# Altium PCB test.PcbDoc
Units mil, origin at the board's own origin, x right, y up, seen from the top; angles counter-clockwise.
Board outline 2620 x 3810 mil, 2 copper layers (Top Layer, Bottom Layer); 80 components, 68 nets, 300 pads, 0 vias.
Unrouted connection lines stored in the file: 148.
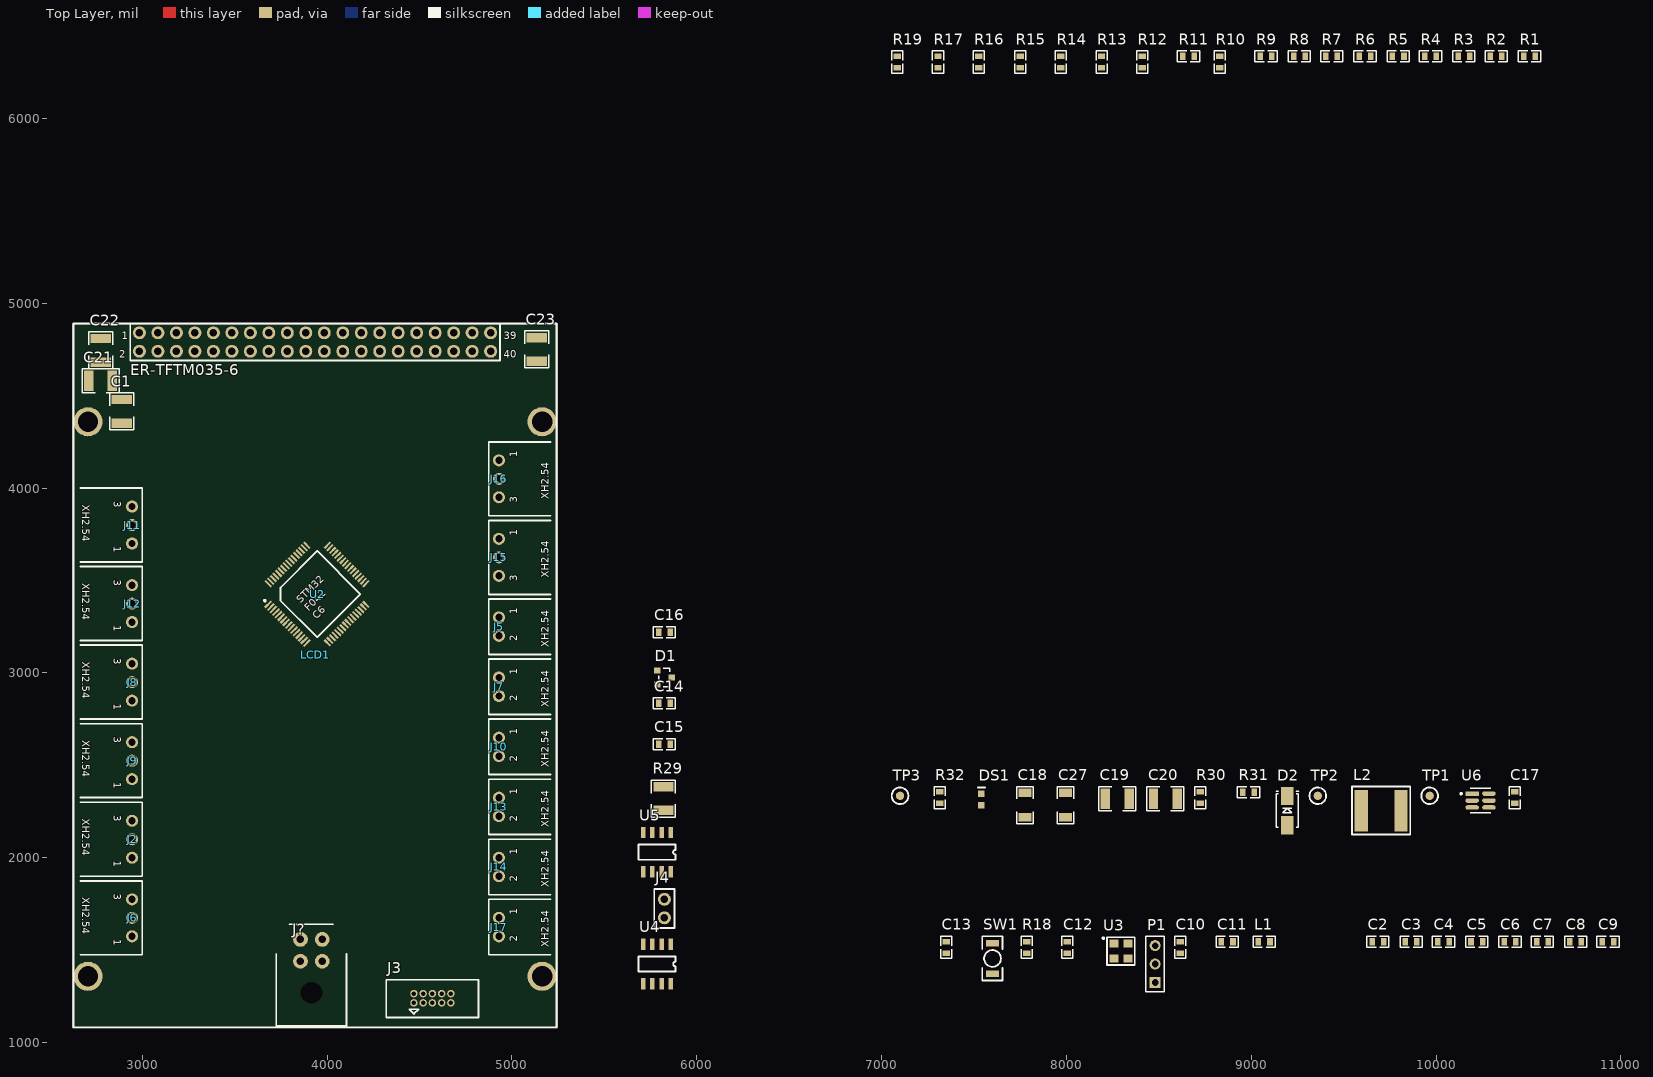
[diagram p0: Top Layer view]
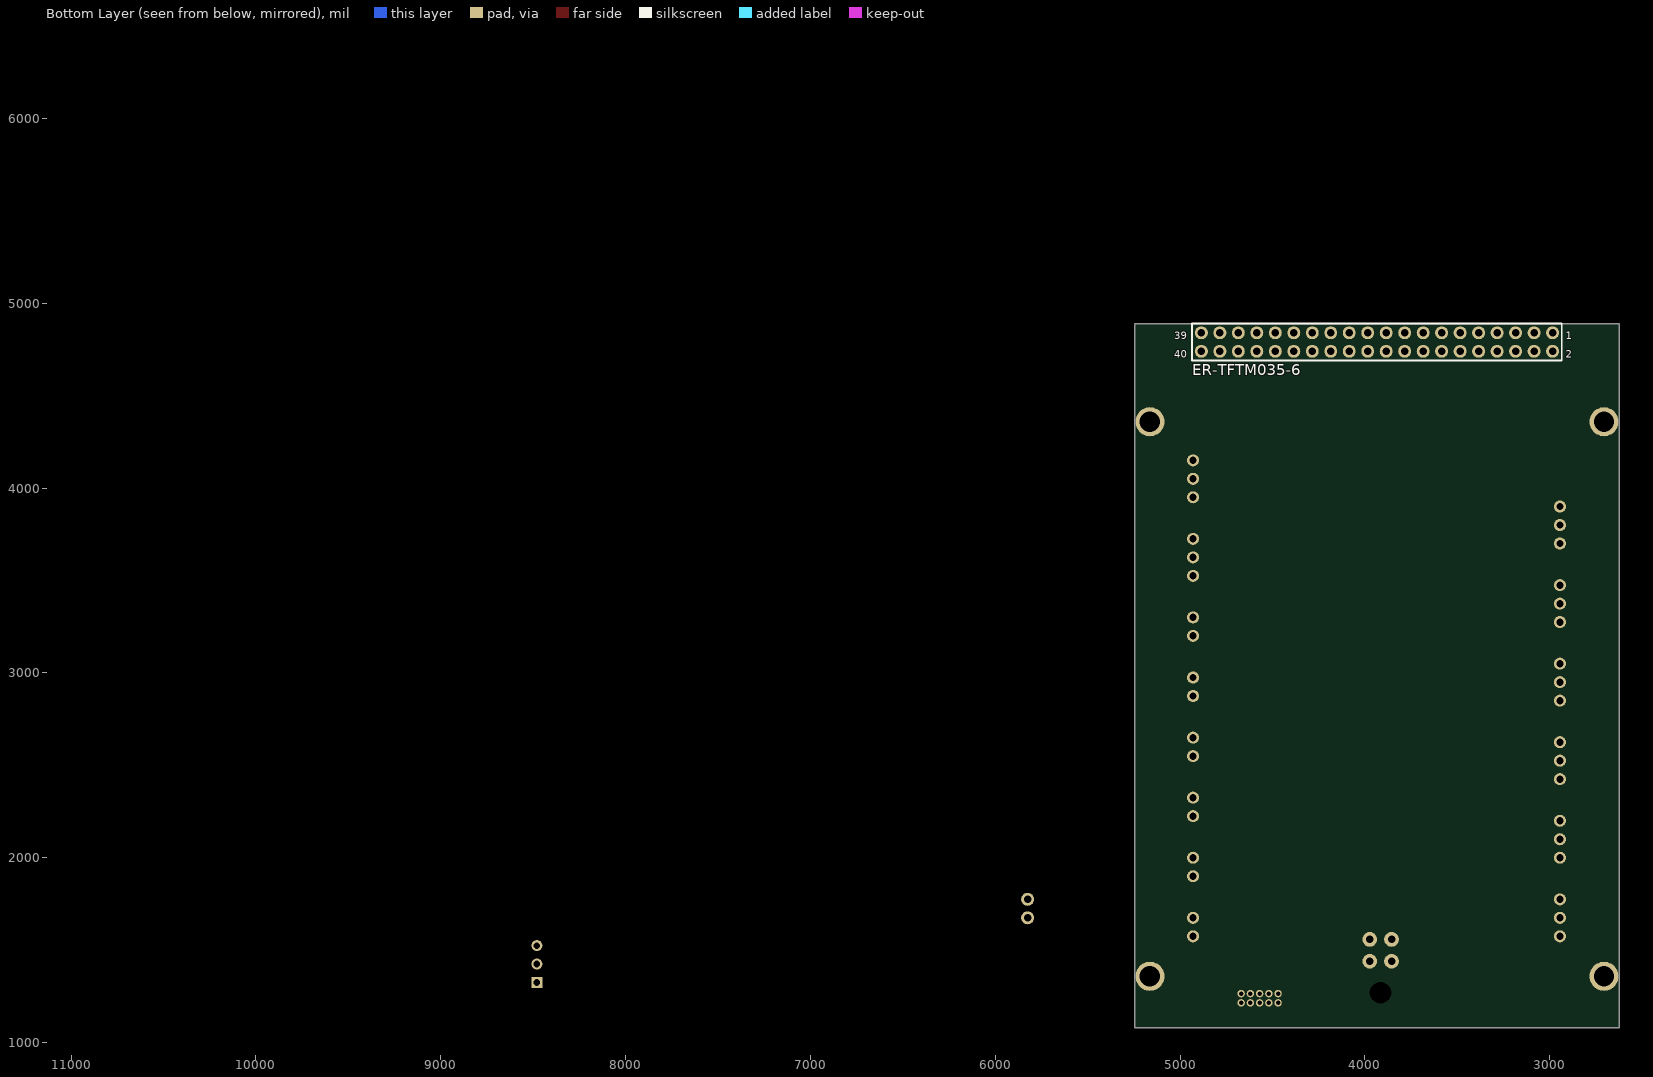
[diagram p1: Bottom Layer view, seen from below]

## Layer stack, top to bottom
Top Solder: solder mask 0.4, Solder Resist, Dk 3.5
Top Layer: signal copper 1.4
Dielectric 1: dielectric 12.6, FR-4, Dk 4.8
Bottom Layer: signal copper 1.4
Bottom Solder: solder mask 0.4, Solder Resist, Dk 3.5

## Board outline
2625,1080 2625,4890 5245,4890 5245,1080

## Design rules (kind name [scope] priority, off if disabled: settings)
Clearance [All] p1: gap=10 ignorepadtopadclearanceinfootprint=FALSE except(0: Arc-Hole Track-Hole SMDPad-Hole THPad-Hole Via-Hole Fill-Hole Poly-Hole Region-Hole Text-Hole)
PolygonConnect [All] p1: connectstyle=Relief reliefconductorwidth=10 reliefentries=4 polygonreliefangle="90 Angle" airgapwidth=10
RoutingVias [All] p1: holewidth=28 width=50 viastyle="Through Hole" minholewidth=28 minwidth=50 maxholewidth=28 maxwidth=50
SolderMaskExpansion [All] p1: expansion=4 istentingtop=FALSE
Width [All] p1: maxlimit=10 minlimit=10 preferedwidth=10
30 further rules are at their usual default settings.

## Classes and differential pairs
component class STRWHL-S01-V00-SteeringWheel: J?
component class STRWHL-S06-V00-Interface: J2 J5 J6 J7 J8 J9 J10 J11 J12 J13 J14 J15 J16 J17
component class STRWHL-S05-V00-Screen: C1 C21 C22 C23 LCD1 R1 R2 R3 R4 R5 R6 R7 R8 R9 R10 R11 R12 R13 R14 R15 R16 R17 R19
component class STRWHL-S04-V00-PSU: C17 C18 C19 C20 C27 D2 DS1 L2 R30 R31 R32 TP1 TP2 TP3 U6
component class STRWHL-S03-V00-IsolatedCAN: C14 C15 C16 D1 J4 R29 U4 U5
component class STRWHL-S02-V00-Microcontroller: C2 C3 C4 C5 C6 C7 C8 C9 C10 C11 C12 C13 J3 L1 P1 R18 SW1 U2 U3

## Components (designator, comment, footprint, x,y, rotation, side; value= is the part's Value field where it differs from the comment)
C1 "47uF 16V 1210" Cap_Ceramic_1210 2890,4415 r90 top
C2 "100nF" Cap_Ceramic_0603 9685,1545 r0 top
C3 "4u7" Cap_Ceramic_0603 9865,1545 r0 top
C4 "100nF" Cap_Ceramic_0603 10040,1545 r0 top
C5 "4u7" Cap_Ceramic_0603 10220,1545 r0 top
C6 "100nF" Cap_Ceramic_0603 10400,1545 r0 top
C7 "4u7" Cap_Ceramic_0603 10575,1545 r0 top
C8 "100nF" Cap_Ceramic_0603 10755,1545 r0 top
C9 "4u7" Cap_Ceramic_0603 10930,1545 r0 top
C10 "1uF" Cap_Ceramic_0603 8615,1515 r90 top
C11 "10nF" Cap_Ceramic_0603 8870,1545 r0 top
C12 "100nF" Cap_Ceramic_0603 8005,1515 r90 top
C13 "100nF" Cap_Ceramic_0603 7350,1515 r90 top
C14 "100nF" Cap_Ceramic_0603 5825,2835 r0 top
C15 "100nF" Cap_Ceramic_0603 5825,2615 r0 top
C16 "100nF" Cap_Ceramic_0603 5825,3220 r0 top
C17 "100nF 100V" Cap_Ceramic_0603 10425,2325 r90 top
C18 "22uF 35V 1206" Cap_Ceramic_1206 7775,2285 r90 top
C19 "47uF 16V 10% X7R 1210" Cap_Ceramic_1210 8275,2320 r0 top
C20 "47uF 16V 10% X7R 1210" Cap_Ceramic_1210 8535,2320 r0 top
C21 "47uF 16V 1210" Cap_Ceramic_1210 2775,4580 r0 top
C22 "47uF 16V 1210" Cap_Ceramic_1210 2775,4745 r270 top
C23 "47uF 16V 1210" Cap_Ceramic_1210 5135,4750 r270 top
C27 "22uF 35V 1206" Cap_Ceramic_1206 7995,2285 r90 top
D1 "NUP2105L" NUP2105L 5825,2975 r270 top
D2 "B260A-13-F" SMA 9195,2255 r90 top
DS1 "LED Green 0603" "LED GREEN 0603" 7540,2315 r90 top
J2 "XH2.54 3P" JST_XH254_3P_TH_RH 2945,2100 r270 top
J3 "IDC 10P 2x5 1.27mm" "IDC 1.27MM 10P" 4570,1240 r0 top
J4 "Jumper 2Way Pins" Jumper_2Way_Pin 5825,1675 r270 top
J5 "XH2.54 2P" JST_XH254_2P_TH_RH 4930,3250 r90 top
J6 "XH2.54 3P" JST_XH254_3P_TH_RH 2945,1675 r270 top
J7 "XH2.54 2P" JST_XH254_2P_TH_RH 4930,2925 r90 top
J8 "XH2.54 3P" JST_XH254_3P_TH_RH 2945,2950 r270 top
J9 "XH2.54 3P" JST_XH254_3P_TH_RH 2945,2525 r270 top
J10 "XH2.54 2P" JST_XH254_2P_TH_RH 4930,2600 r90 top
J11 "XH2.54 3P" JST_XH254_3P_TH_RH 2945,3800 r270 top
J12 "XH2.54 3P" JST_XH254_3P_TH_RH 2945,3375 r270 top
J13 "XH2.54 2P" JST_XH254_2P_TH_RH 4930,2275 r90 top
J14 "XH2.54 2P" JST_XH254_2P_TH_RH 4930,1950 r90 top
J15 "XH2.54 3P" JST_XH254_3P_TH_RH 4930,3625 r90 top
J16 "XH2.54 3P" JST_XH254_3P_TH_RH 4930,4050 r90 top
J17 "XH2.54 2P" JST_XH254_2P_TH_RH 4930,1625 r90 top
J? "Microfit 3.0 2x2" Microfit_2X2_R_TH 3915,1270 r0 top
L1 "10uH, 10%, 0603" Inductor_0603 9070,1545 r0 top
L2 "74404064221" Inductor_6x6mm 9700,2255 r0 top
LCD1 "ER-TFTM035-6" ER-TFTM035-6 3935,4890 r0 top locked
P1 "UART" HDR1X3 8480,1325 r90 top
R1 "10k" Res_ThinFilm_0603 10505,6335 r0 top
R2 "10k" Res_ThinFilm_0603 10325,6335 r0 top
R3 "10k" Res_ThinFilm_0603 10150,6335 r0 top
R4 "10k" Res_ThinFilm_0603 9970,6335 r0 top
R5 "10k" Res_ThinFilm_0603 9795,6335 r0 top
R6 "10k" Res_ThinFilm_0603 9615,6335 r0 top
R7 "10k" Res_ThinFilm_0603 9435,6335 r0 top
R8 "10k" Res_ThinFilm_0603 9260,6335 r0 top
R9 "10k" Res_ThinFilm_0603 9080,6335 r0 top
R10 "10k" Res_ThinFilm_0603 8830,6305 r90 top
R11 "10k" Res_ThinFilm_0603 8660,6335 r0 top
R12 "10k" Res_ThinFilm_0603 8410,6305 r90 top
R13 "10k" Res_ThinFilm_0603 8190,6305 r90 top
R14 "10k" Res_ThinFilm_0603 7970,6305 r90 top
R15 "10k" Res_ThinFilm_0603 7750,6305 r90 top
R16 "10k" Res_ThinFilm_0603 7525,6305 r90 top
R17 "10k" Res_ThinFilm_0603 7305,6305 r90 top
R18 "4k7" Res_ThinFilm_0603 7785,1515 r90 top
R19 "10k" Res_ThinFilm_0603 7085,6305 r90 top
R29 "120R 1% 1210" Res_ThinFilm_1210 5820,2320 r270 top
R30 "64k9 1%" Res_ThinFilm_0603 8725,2325 r90 top
R31 "1k" Res_ThinFilm_0603 8985,2355 r0 top
R32 "19k6 1%" Res_ThinFilm_0603 7315,2325 r90 top
SW1 "B3U-1000P" "BTN B3U-1000P" 7600,1455 r90 top
TP1 "TestPoint_SMD" TestPointSMD 9965,2335 r0 top
TP2 "TestPoint_SMD" TestPointSMD 9360,2335 r0 top
TP3 "TestPoint_SMD" TestPointSMD 7100,2335 r0 top
U2 "STM32F302RC" STM32F302RC -1357.34,1472.54 r45 top
U3 "DSC1001DI1-008.0000T" DSC1001DI1-008.0000TCT-ND 8295,1495 r0 top
U4 "Si8621BC-B-IS" Si8621BC-B-IS 5785,1425 r270 top
U5 "SN65HVD233" SN65HVD233DR 5785,2030 r270 top
U6 "LMR14010" LMR14010 10240,2310 r0 top

## Footprints (in the part's own frame and the unit in brackets; to place one, negate y for a bottom-side part, rotate by r counter-clockwise, add the part's x,y. Pads: shape width x height; smd on the part's side, far side on the other; paste and mask are expansions set on the pad)
"BTN B3U-1000P" [mil] "OMRON B3U-1000P"
  rect 35x70 smd: 1(-82.68,0) 2(82.68,0)
  silkscreen extent -120,-55 120,55, body extent -79,-49 79,49, height 63
Cap_Ceramic_0603 [mil]
  rect 30x40 smd: 1(-31.24,0) 2(31.24,0)
  silkscreen extent -60,-30 60,30, body extent -31,-16 32,16, height 33
Cap_Ceramic_1206 [mil]
  rect 47x71 smd: 1(-66.08,0) 2(66.08,0)
  silkscreen extent -100,-45 100,45, body extent -63,-31 63,32, height 53
Cap_Ceramic_1210 [mm]
  rect 1.3x2.8 smd: 1(-1.625,0) 2(1.625,0)
  silkscreen extent -2.54,-1.65 2.54,1.65, body extent -1.6,-1.25 1.6,1.25, height 1.35
DSC1001DI1-008.0000TCT-ND [mil]
  rect 48x43 smd: 1(-37.4,41.34) 2(37.4,41.34) 3(37.4,-41.34) 4(-37.4,-41.34)
  silkscreen extent -100,-75 75,75, body extent -49,-63 49,63, height 33
ER-TFTM035-6 [mil]
  round 70 hole 40: 1(-950,-50) 2(-950,-150) 3(-850,-50) 4(-850,-150) 5(-750,-50) 6(-750,-150) 7(-650,-50) 8(-650,-150) 9(-550,-50) 10(-550,-150) 11(-450,-50) 12(-450,-150) 13(-350,-50) 14(-350,-150) 15(-250,-50) 16(-250,-150) 17(-150,-50) 18(-150,-150) 19(-50,-50) 20(-50,-150) 21(50,-50) 22(50,-150) 23(150,-50) 24(150,-150) 25(250,-50) 26(250,-150) 27(350,-50) 28(350,-150) 29(450,-50) 30(450,-150) 31(550,-50) 32(550,-150) 33(650,-50) 34(650,-150) 35(750,-50) 36(750,-150) 37(850,-50) 38(850,-150) 39(950,-50) 40(950,-150)
  round 157.48 hole 110.24: N/C(-1228.35,-3531.5) N/C(-1228.35,-531.5) N/C(1228.35,-3531.5) N/C(1228.35,-531.5)
  silkscreen extent -1307,-3807 1307,0, body extent -1305,-3805 1305,0, height 598
HDR1X3 [mm] "Connector; Header; 3 Position"
  rect 1.5x1.5 hole 0.9: 1(0,0)
  round 1.5 hole 0.9: 2(2.54,0) 3(5.08,0)
  silkscreen extent -1.27,-1.27 6.35,1.27
"IDC 1.27MM 10P" [mil]
  round 40 hole 25: 1(-100,-25) 2(-100,25) 3(-50,-25) 4(-50,25) 5(0,-25) 6(0,25) 7(50,-25) 8(50,25) 9(100,-25) 10(100,25)
  silkscreen extent -250,-105 250,100, body extent -249,-104 249,100, height 214
Inductor_6x6mm [mm]
  rect 1.8x5.7 smd: 1(-2.667,0) 2(2.794,0)
  silkscreen extent -3.94,-3.3 4.06,3.3, body extent -3,-3 3,3, height 4.56
Inductor_0603 [mil]
  rect 30x40 smd: 1(-31.24,0) 2(31.24,0)
  silkscreen extent -60,-30 60,30, body extent -31,-16 32,16, height 18
JST_XH254_2P_TH_RH [mil]
  round 65 hole 40: 1(50,0) 2(-50,0)
  silkscreen extent -150,-280 150,55, body extent -142,-307 142,10, height 230
JST_XH254_3P_TH_RH [mil]
  round 65 hole 40: 1(100,0) 2(0,0) 3(-100,0)
  silkscreen extent -200,-280 200,55, body extent -192,-307 192,10, height 230
Jumper_2Way_Pin [mil]
  round 70 hole 40: 1(-100,0) 2(0,0)
  silkscreen extent -155,-55 55,55, body extent -142,-48 42,47, height 332
"LED GREEN 0603" [mil]
  rect 35x35 smd: 1(-30,0) 2(30,0)
  silkscreen extent 65,-20 65,20, body extent -40,-20 40,20, height 30
LMR14010 [mil]
  rect 73.01x24.1 smd paste+0 mask+0: 1(-44.73,36.75)
  rrect100% 73.01x24.1 smd paste+0 mask+0: 2(-44.73,-0.65) 3(-44.73,-38.05) 4(45.84,-38.05) 5(45.84,-0.65) 6(45.84,36.75)
  silkscreen extent -110,-68 56,66, body extent -101,-77 102,76, height 10
Microfit_2X2_R_TH [mil]
  round 80 hole 40: 1(59.06,170) 2(-59.06,170) 3(59.06,288.19) 4(-59.06,288.19)
  round 0 hole 118.11 mask+10: NC(0,0)
  silkscreen extent -190,-180 190,370, body extent -200,-180 200,302, height 350
NUP2105L [mm]
  rect 0.8x0.9 smd: 1(-0.95,-1) 2(0.95,-1) 3(0,1)
  silkscreen extent -1.27,-0.76 1.27,0.76, body extent -1.45,-1.22 1.45,1.18, height 1
Res_ThinFilm_0603 [mil]
  rect 30x40 smd: 1(-31.24,0) 2(31.24,0)
  silkscreen extent -60,-30 60,30, body extent -31,-16 32,16, height 18
Res_ThinFilm_1210 [mm]
  rect 1.3x2.8 smd: 1(-1.625,0) 2(1.625,0)
  silkscreen extent -2.54,-1.65 2.54,1.65, body extent -1.6,-1.25 1.6,1.25, height 0.6
Si8621BC-B-IS [mm]
  rect 1.55x0.6 smd: 1(-2.7,1.905) 2(-2.7,0.635) 3(-2.7,-0.635) 4(-2.7,-1.905) 5(2.7,-1.905) 6(2.7,-0.635) 7(2.7,0.635) 8(2.7,1.905)
  silkscreen extent -1.04,-2.54 1.04,2.54, body extent -3.01,-2.45 3.01,2.45, height 1.63
SMA [mm]
  rect 2.5x1.7 smd: A(-2,0) K(2,0)
  silkscreen extent -2.3,-1.52 2.67,1.52, body extent -2.52,-1.46 2.52,1.46, height 2.4
SN65HVD233DR [mm]
  rect 1.55x0.6 smd: 1(-2.7,1.903) 2(-2.7,0.633) 3(-2.7,-0.637) 4(-2.7,-1.907) 5(2.7,-1.907) 6(2.7,-0.637) 7(2.7,0.633) 8(2.7,1.903)
  silkscreen extent -1.04,-2.54 1.04,2.54, body extent -3.01,-2.45 3.01,2.45, height 1.63
STM32F302RC [mm]
  rect 1.3x0.3 smd: 1(124.596,-56.413) 2(124.596,-56.913) 3(124.596,-57.413) 4(124.596,-57.913) 5(124.596,-58.413) 6(124.596,-58.913) 7(124.596,-59.413) 8(124.596,-59.913) 9(124.596,-60.413) 10(124.596,-60.913) 11(124.596,-61.413) 12(124.596,-61.913) 13(124.596,-62.413) 14(124.596,-62.913) 15(124.596,-63.413) 16(124.596,-63.913)
  rect 0.3x1.2 smd: 17(126.596,-65.913) 18(127.096,-65.913) 19(127.596,-65.913) 20(128.096,-65.913) 21(128.596,-65.913) 22(129.096,-65.913) 23(129.596,-65.913) 24(130.096,-65.913) 25(130.596,-65.913) 26(131.096,-65.913) 27(131.596,-65.913) 28(132.096,-65.913) 29(132.596,-65.913) 30(133.096,-65.913) 31(133.596,-65.913) 32(134.096,-65.913) 49(134.096,-54.413) 50(133.596,-54.413) 51(133.096,-54.413) 52(132.596,-54.413) 53(132.096,-54.413) 54(131.596,-54.413) 55(131.096,-54.413) 56(130.596,-54.413) 57(130.096,-54.413) 58(129.596,-54.413) 59(129.096,-54.413) 60(128.596,-54.413) 61(128.096,-54.413) 62(127.596,-54.413) 63(127.096,-54.413) 64(126.596,-54.413)
  rect 1.2x0.3 smd: 33(136.096,-63.913) 34(136.096,-63.413) 35(136.096,-62.913) 36(136.096,-62.413) 37(136.096,-61.913) 38(136.096,-61.413) 39(136.096,-60.913) 40(136.096,-60.413) 41(136.096,-59.913) 42(136.096,-59.413) 43(136.096,-58.913) 44(136.096,-58.413) 45(136.096,-57.913) 46(136.096,-57.413) 47(136.096,-56.913) 48(136.096,-56.413)
  silkscreen extent 124.5,-64.35 134.54,-55.59, body extent 124.28,-66.23 136.42,-54.09, height 1.6
TestPointSMD [mil]
  round 45 smd: 1(0,0)
  silkscreen extent -45,-45 45,45

## Part data
C1 C21 C22 C23: library part "47uF 16V 10% X7R 1210", "Capacitor, Ceramic, SMD, 47uF, 16V, 5%, X7R, 1210"
C2 C4 C6 C8 C12 C13 C14 C15 C16: library part "100nF 50V 5% X7R 0603", "Capacitor, Ceramic, SMD, 100nF, 50V, 5%, X7R, 0603"
C3 C5 C7 C9: library part "4u7 50V 5% X7R 0603", "Capacitor, Ceramic, SMD, 4u7, 50V, 5%, X7R, 0603"
C10: library part "1uF 25V 5% X7R 0603", "Capacitor, Ceramic, SMD, 1uF, 25V, 5%, X7R, 0603"
C11: library part "10nF 50V 5% X7R 0603", "Capacitor, Ceramic, SMD, 10nF, 50V, 5%, X7R, 0603"
C17: library part "100nF 100V 5% X7R 0603", "Capacitor, Ceramic, SMD, 100nF, 100V, 5%, X7R, 0603"
C18 C27: library part "22uF 35V 10% X7R 1206", "Capacitor, Ceramic, SMD, 22uF, 35V, 10%, X7R, 1206"
C19 C20: "Capacitor, Ceramic, SMD, 47uF, 16V, 5%, X7R, 1210"
D2: "Diode, Schottky Barrier Rectifier, 60 V, 2 A, B260A-13-F"
J4: library part "Jumper 2Way Side Pins", "Jumper 2Way Side Pins"
J?: library part Microfit_2x2
L2: "FIXED IND 220UH 660MA 850 MOHM", ComponentLink1Description=Digikey, ComponentLink1URL=https://www.digikey.com.au/product-detail/en/w%C3%BCrth-elektronik/74404064221/732-7261-1-ND/5353241, ComponentLink2Description="LCSC A", ComponentLink2URL=https://lcsc.com/product-detail/Power-Inductors_Sunlord-SWPA6045S221MT_C91047.html, ComponentLink3Description="LCSC B", ComponentLink3URL=https://lcsc.com/product-detail/Power-Inductors_SXN-Shun-Xiang-Nuo-Elec-SMNR6045-221MT_C467145.html
LCD1: "LCD 3.5\" 320x480 TFT Display Module, OPTL Touch Screen w/Breakout Board", ComponentLink1Description=Website, ComponentLink1URL=https://www.buydisplay.com/lcd-3-5-inch-320x480-tft-display-module-optl-touch-screen-w-breakout-board
P1: library part "Header 3", "Header, 3-Pin", LatestRevisionDate=17-Jul-2002, LatestRevisionNote="Re-released for DXP Platform.", Publisher="Altium Limited"
R1 R2 R3 R4 R5 R6 R7 R8 R9 R10 R11 R12 R13 R14 R15 R16 R17 R19: library part "10k 5% 0603", "Resistor, SMD, 10k, 0.1W, 5%, 0603"
R18: library part "4k7 5% 0603", "Resistor, SMD, 4k7, 0.1W, 5%, 0603"
R29: "Resistor, SMD, 120R, 0.25W, 1%, 1210"
R30: library part "64k9 1% 0603", "Resistor, SMD, 64k9, 0.1W, 5%, 0603"
R31: library part "1k 5% 0603", "Resistor, SMD, 1k, 0.1W, 5%, 0603"
R32: library part "19k6 1% 0603", "Resistor, SMD, 19k6, 0.1W, 5%, 0603"
SW1: library part "BTN B3U-1000P", "Omron B3U-1000P Ultra Miniture Switch", ComponentLink1Description=LCSC, ComponentLink1URL=https://lcsc.com/product-detail/Tactile-Switches_BRIGHT-TSA063G50-250_C294565.html
U2: "ARM® Cortex®-M4 STM32F3 Microcontroller IC 32-Bit 72MHz 256KB (256K x 8) FLASH 64-LQFP (10x10)", ComponentLink1Description=Digikey, ComponentLink1URL=https://www.digikey.com.au/product-detail/en/stmicroelectronics/STM32F302RCT6TR/497-19000-1-ND/9974332, ComponentLink2Description=Datasheet, ComponentLink2URL=http://www.st.com/content/ccc/resource/technical/document/datasheet/67/73/21/b9/f2/b3/4d/f8/DM00094064.pdf/files/DM00094064.pdf/jcr:content/translations/en.DM00094064.pdf
U3: "on 8MHz XO (Standard) CMOS Oscillator 1.8 ~ 3.3V Standby (Power Down) 4-SMD, No Lead"
D1: ComponentLink1Description=Datasheet, ComponentLink1URL=https://www.onsemi.cn/PowerSolutions/document/NUP2105L-D.PDF, ComponentLink2Description=LCSC, ComponentLink2URL=https://lcsc.com/product-detail/TVS_ON-Semiconductor-NUP2105LT1G_C14486.html, ComponentLink3Description=Digikey, ComponentLink3URL=https://www.digikey.com.au/product-detail/en/on-semiconductor/SZNUP2105LT1G/SZNUP2105LT1GOSCT-ND/3487669
L1: ComponentLink1Description=Digikey, ComponentLink1URL=https://www.digikey.com.au/product-detail/en/w%C3%BCrth-elektronik/74404064221/732-7261-1-ND/5353241, ComponentLink2Description="LCSC A", ComponentLink2URL=https://lcsc.com/product-detail/Power-Inductors_Sunlord-SWPA6045S221MT_C91047.html, ComponentLink3Description="LCSC B", ComponentLink3URL=https://lcsc.com/product-detail/Power-Inductors_SXN-Shun-Xiang-Nuo-Elec-SMNR6045-221MT_C467145.html
U4: ComponentLink1Description=Digikey, ComponentLink1URL=https://www.digikey.com.au/product-detail/en/silicon-labs/SI8621BC-B-ISR/336-4774-1-ND/8611005, ComponentLink2Description=Datasheet, ComponentLink2URL=https://www.silabs.com/documents/public/data-sheets/si861x-2x-datasheet.pdf
U5: ComponentLink1Description=LCSC, ComponentLink1URL=https://lcsc.com/product-detail/CAN-ICs_Texas-Instruments_SN65HVD233DRG4_Texas-Instruments-Texas-Instruments-SN65HVD233DRG4_C61643.html, ComponentLink2Description=Digikey, ComponentLink2URL=https://www.digikey.com.au/product-detail/en/texas-instruments/SN65HVD233DR/296-35967-1-ND/4134960, ComponentLink3Description=Datasheet, ComponentLink3URL=https://www.ti.com/lit/ds/symlink/sn65hvd233.pdf?ts=1588560888178, ComponentLink4Description="Ti Product Page", ComponentLink4URL=https://www.ti.com/product/SN65HVD233

## Nets (pads, with @x,y where several pads share a name; then routed paths per layer and width w, separated by ;. In a path a pad name is that pad's centre, name@x,y a point inside that pad or via, vN(x,y) a via of type N, cw(c..) or ccw(c..) an arc to the next point about the centre after c; other vN are vias at no path point)
3V3: C1.2 C2.2 C3.2 C4.2 C5.2 C6.2 C7.2 C8.2 C9.2 C12.2 C14.2 C15.2 C16.2 C19.2 C20.2 C21.2 C22.2 C23.2 J3.1 L1.1 L2.2 LCD1.2 R18.2 R30.2 R31.2 TP1.1 U2.1 U2.19 U2.32 U2.48 U2.64 U3.1 U3.4 U4.1 U4.8 U5.3
12: C18.2 C27.2 U6.4 U6.5
12V: J?.3
BOOT0: U2.60
"CAN H": D1.2 J4.1 U5.7
"CAN L": D1.1 R29.1 U5.6
"CAN RX": U2.44 U4.3
"CAN TERM": J4.2 R29.2
"CAN TX": U2.45 U4.2
"CTP INT": R14.2 U2.30
"CTP INT R": LCD1.39 R14.1
"FLASH CS": R17.2 U2.39
"FLASH CS R": LCD1.37 R17.1
"FLASH WP": R19.2 U2.40
"FLASH WP R": LCD1.38 R19.1
"FONT CS": R16.2 U2.38
"FONT CS R": LCD1.36 R16.1
GND: C1.1 C2.1 C3.1 C4.1 C5.1 C6.1 C7.1 C8.1 C9.1 C10.1 C11.1 C12.1 C13.1 C15.1 C18.1 C19.1 C20.1 C21.1 C22.1 C23.1 C27.1 D2.A DS1.2 J3.3 J3.5 J3.9 J?.1 LCD1.1 LCD1.40 P1.3 R32.1 SW1.1 U2.6 U2.12 U2.31 U2.47 U2.63 U3.2 U4.4 U6.2
"ISO CAN RX": U4.6 U5.4
"ISO CAN TX": U4.7 U5.1
"ISO GND": C14.1 C16.1 D1.3 U4.5 U5.2 U5.8
NetC10_2: C10.2 C11.2 L1.2 U2.13
NetDS1_1: DS1.1 R31.1
NRST: C13.2 J3.10 R18.1 SW1.2 U2.7
"OSC IN": U2.5 U3.3
PC13: U2.2
PC14: U2.3
PC15: U2.4
PD2: U2.54
PF4: U2.18
"PROG A": J3.6
"PROG B": J3.7
"PROG C": J3.8
"PWR CB": C17.1 U6.1
"PWR FB": R30.1 R32.2 TP3.1 U6.3
"PWR SW": C17.2 D2.K L2.1 TP2.1 U6.6
"RTP CS": R12.2 U2.58
"RTP CS R": LCD1.30 R12.1
"RTP INT": R13.2 U2.59
"RTP INT R": LCD1.31 R13.1
"SCREEN BKLIGH R": LCD1.29 R3.1
"SCREEN BKLIGHT": R3.2 U2.29
"SCREEN CS": R7.2 U2.51
"SCREEN CS R": LCD1.23 R7.1
"SCREEN D/C": R8.2 U2.52
"SCREEN D/C R": LCD1.25 R8.1
"SCREEN RESET": R1.2 U2.61
"SCREEN RESET R": LCD1.21 R1.1
"SCREEN TE": R2.2 U2.62
"SCREEN TE R": LCD1.22 R2.1
"SD CS": R15.2 U2.37
"SD CS R": LCD1.35 R15.1
"SPI1 CLK": R4.2 U2.20
"SPI1 CLK R": LCD1.24 R4.1
"SPI1 MISO": R6.2 U2.21
"SPI1 MISO R": LCD1.28 R6.1
"SPI1 MOSI": R5.2 U2.22
"SPI1 MOSI R": LCD1.27 R5.1
"SPI2 CLK": R9.2 U2.34
"SPI2 CLK R": LCD1.33 R9.1
"SPI2 MISO": R10.2 U2.35
"SPI2 MISO R": LCD1.32 R10.1
"SPI2 MOSI": R11.2 U2.36
"SPI2 MOSI R": LCD1.34 R11.1
SWCLK: J3.4 U2.49
SWDIO: J3.2 U2.46
"USART1 RX": P1.2 U2.27
"USART1 TX": P1.1 U2.26
pads on no net: J2.1 J2.2 J2.3 J5.1 J5.2 J6.1 J6.2 J6.3 J7.1 J7.2 J8.1 J8.2 J8.3 J9.1 J9.2 J9.3 J10.1 J10.2 J11.1 J11.2 J11.3 J12.1 J12.2 J12.3 J13.1 J13.2 J14.1 J14.2 J15.1 J15.2 J15.3 J16.1 J16.2 J16.3 J17.1 J17.2 J?.2 J?.4 J?.NC LCD1.3 LCD1.4 LCD1.5 LCD1.6 LCD1.7 LCD1.8 LCD1.9 LCD1.10 LCD1.11 LCD1.12 LCD1.13 LCD1.14 LCD1.15 LCD1.16 LCD1.17 LCD1.18 LCD1.19 LCD1.20 LCD1.26 LCD1.N/C U2.8 U2.9 U2.10 U2.11 U2.14 U2.15 U2.16 U2.17 U2.23 U2.24 U2.25 U2.28 U2.33 U2.41 U2.42 U2.43 U2.50 U2.53 U2.55 U2.56 U2.57 U5.5

## Silkscreen, mask and mechanical layers (free items; w line width, h text height)
Mechanical 1:
  the board outline again, w10

## Text inside footprints (layer, text, board x,y; h text height)
J2: Top Overlay "XH2.54" at 2675,2210 h40 r270; Top Overlay "3" at 2845,2229.5 h40 r270; Top Overlay "1" at 2845,1983.83 h40 r270; Mechanical 1 "Board Edge" at 2655,2150 h10 r270
J5: Top Overlay "1" at 5030,3316.17 h40 r90; Top Overlay "2" at 5030,3170.5 h40 r90; Top Overlay "XH2.54" at 5200,3140 h40 r90; Mechanical 1 "Board Edge" at 5220,3200 h10 r90
J6: Top Overlay "XH2.54" at 2675,1785 h40 r270; Top Overlay "3" at 2845,1804.5 h40 r270; Top Overlay "1" at 2845,1558.83 h40 r270; Mechanical 1 "Board Edge" at 2655,1725 h10 r270
J7: Top Overlay "1" at 5030,2991.17 h40 r90; Top Overlay "2" at 5030,2845.5 h40 r90; Top Overlay "XH2.54" at 5200,2815 h40 r90; Mechanical 1 "Board Edge" at 5220,2875 h10 r90
J8: Top Overlay "XH2.54" at 2675,3060 h40 r270; Top Overlay "3" at 2845,3079.5 h40 r270; Top Overlay "1" at 2845,2833.83 h40 r270; Mechanical 1 "Board Edge" at 2655,3000 h10 r270
J9: Top Overlay "XH2.54" at 2675,2635 h40 r270; Top Overlay "3" at 2845,2654.5 h40 r270; Top Overlay "1" at 2845,2408.83 h40 r270; Mechanical 1 "Board Edge" at 2655,2575 h10 r270
J10: Top Overlay "1" at 5030,2666.17 h40 r90; Top Overlay "2" at 5030,2520.5 h40 r90; Top Overlay "XH2.54" at 5200,2490 h40 r90; Mechanical 1 "Board Edge" at 5220,2550 h10 r90
J11: Top Overlay "XH2.54" at 2675,3910 h40 r270; Top Overlay "3" at 2845,3929.5 h40 r270; Top Overlay "1" at 2845,3683.83 h40 r270; Mechanical 1 "Board Edge" at 2655,3850 h10 r270
J12: Top Overlay "XH2.54" at 2675,3485 h40 r270; Top Overlay "3" at 2845,3504.5 h40 r270; Top Overlay "1" at 2845,3258.83 h40 r270; Mechanical 1 "Board Edge" at 2655,3425 h10 r270
J13: Top Overlay "1" at 5030,2341.17 h40 r90; Top Overlay "2" at 5030,2195.5 h40 r90; Top Overlay "XH2.54" at 5200,2165 h40 r90; Mechanical 1 "Board Edge" at 5220,2225 h10 r90
J14: Top Overlay "1" at 5030,2016.17 h40 r90; Top Overlay "2" at 5030,1870.5 h40 r90; Top Overlay "XH2.54" at 5200,1840 h40 r90; Mechanical 1 "Board Edge" at 5220,1900 h10 r90
J15: Top Overlay "1" at 5030,3741.17 h40 r90; Top Overlay "3" at 5030,3495.5 h40 r90; Top Overlay "XH2.54" at 5200,3515 h40 r90; Mechanical 1 "Board Edge" at 5220,3575 h10 r90
J16: Top Overlay "1" at 5030,4166.17 h40 r90; Top Overlay "3" at 5030,3920.5 h40 r90; Top Overlay "XH2.54" at 5200,3940 h40 r90; Mechanical 1 "Board Edge" at 5220,4000 h10 r90
J17: Top Overlay "XH2.54" at 5200,1515 h40 r90; Top Overlay "2" at 5030,1545.5 h40 r90; Top Overlay "1" at 5030,1691.17 h40 r90; Mechanical 1 "Board Edge" at 5220,1575 h10 r90
LCD1: Top Overlay "1" at 2889.67,4805 h40; Top Overlay "2" at 2876.34,4705 h40; Top Overlay "39" at 4956.34,4805 h40; Top Overlay "40" at 4956.34,4705 h40; Bottom Overlay "1" at 2913.66,4805 h40; Bottom Overlay "2" at 2913.66,4705 h40; Bottom Overlay "39" at 5031.34,4805 h40; Bottom Overlay "40" at 5031.34,4705 h40
U2: Top Overlay "STM32 / F042 / C6" at 3942.92,3288.22 h40 r45